# Altium PCB AICat V1.4 双面板 板厚1.6mm.PcbDoc (part 1 of 4)
Units mm, origin at the board's own origin, x right, y up, seen from the top; angles counter-clockwise.
Board outline 152.4 x 101.6 mm, 2 copper layers (Top Layer, Bottom Layer); 106 components, 84 nets, 315 pads, 240 vias.
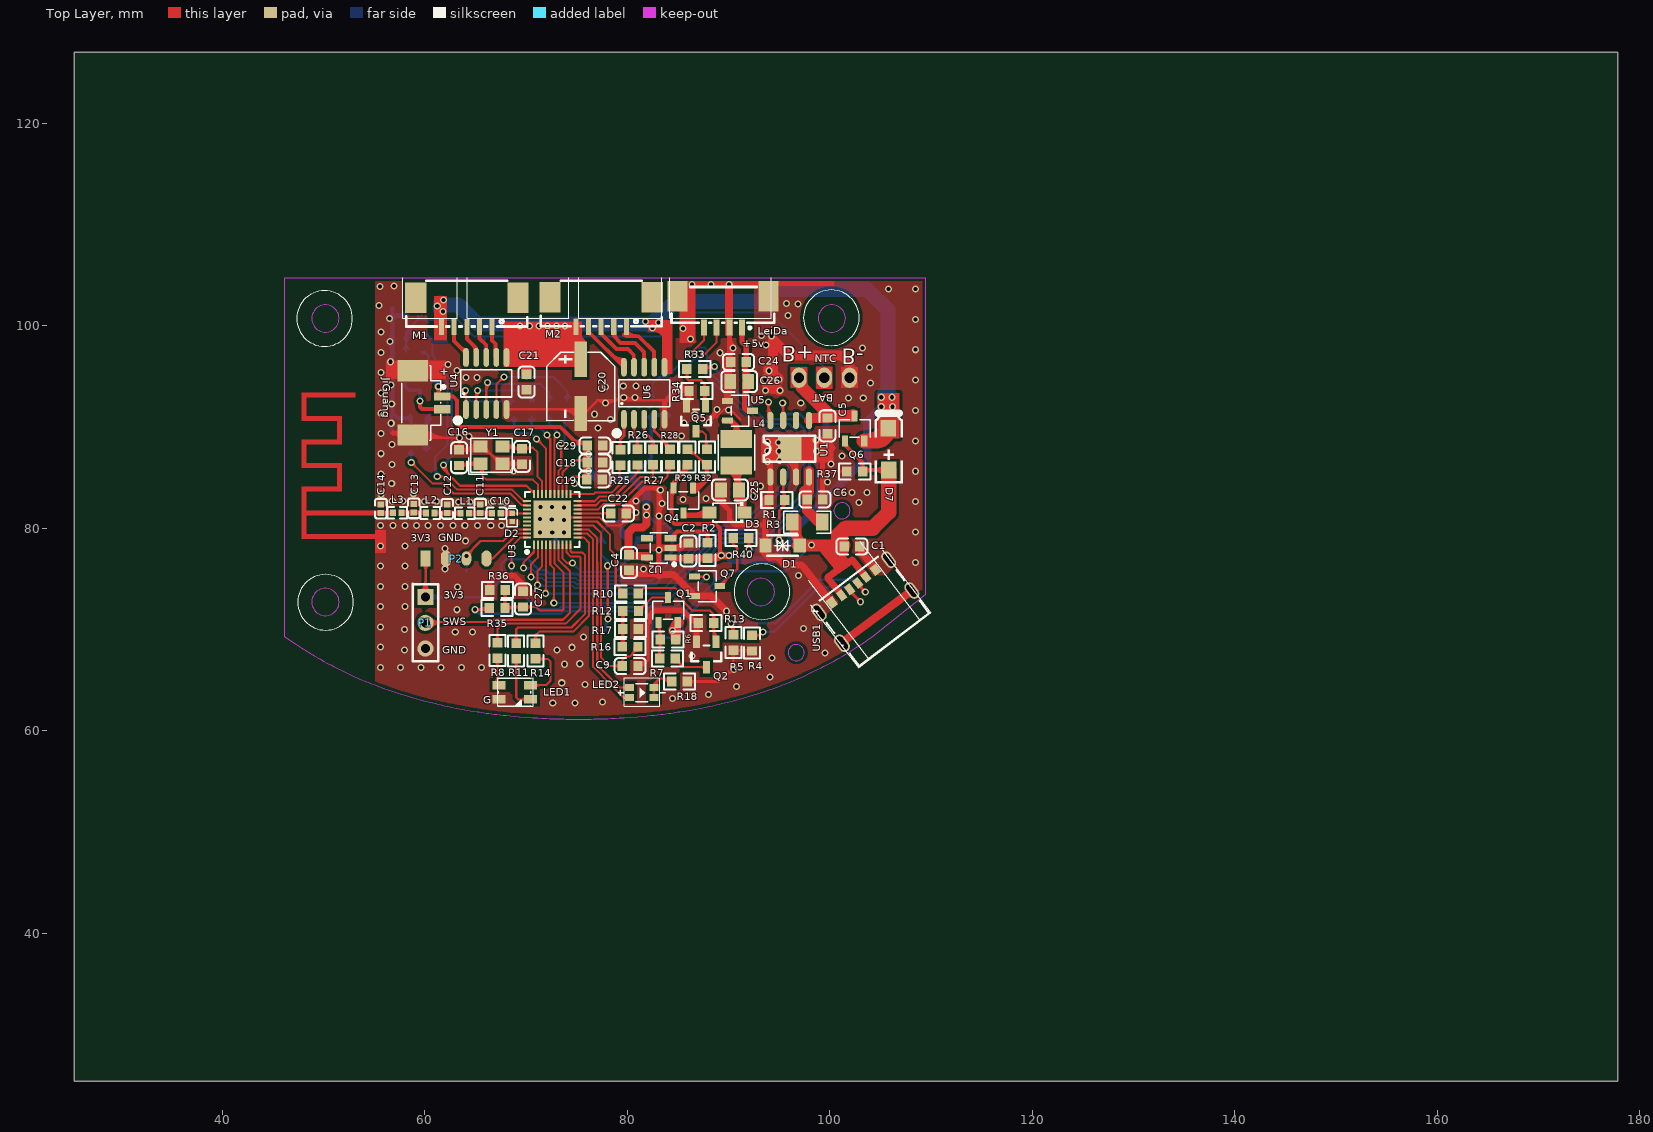
[diagram p0: Top Layer view]
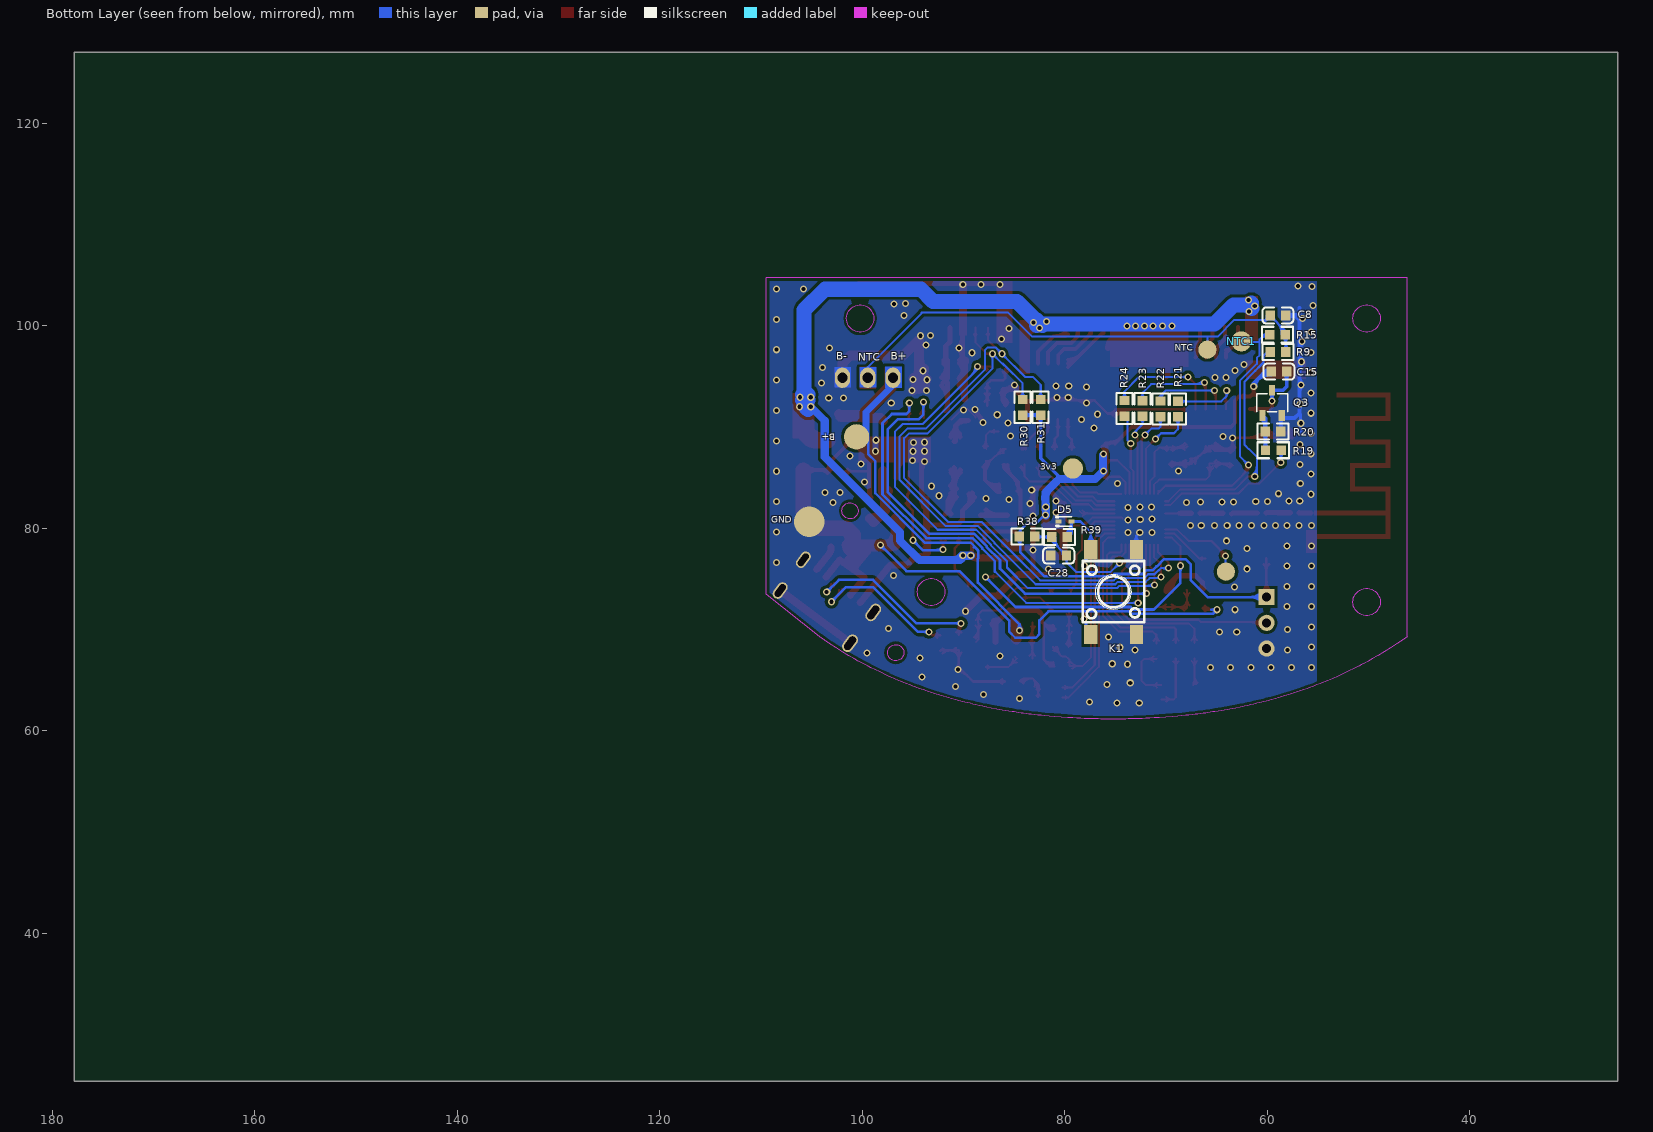
[diagram p1: Bottom Layer view, seen from below]
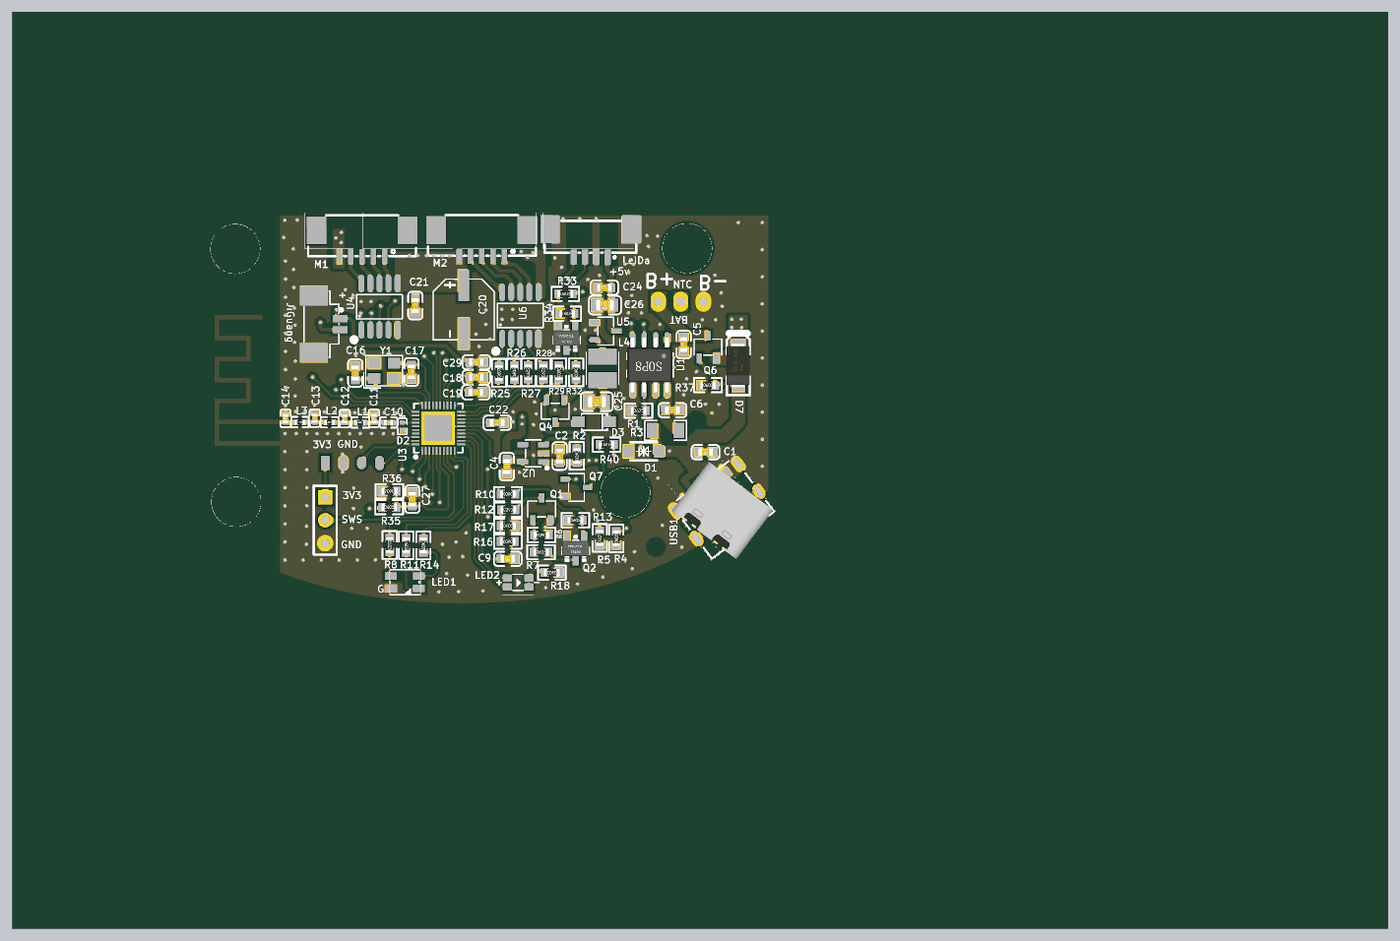
[diagram p5: 3D render of the assembled board from above, using the file's embedded part models]
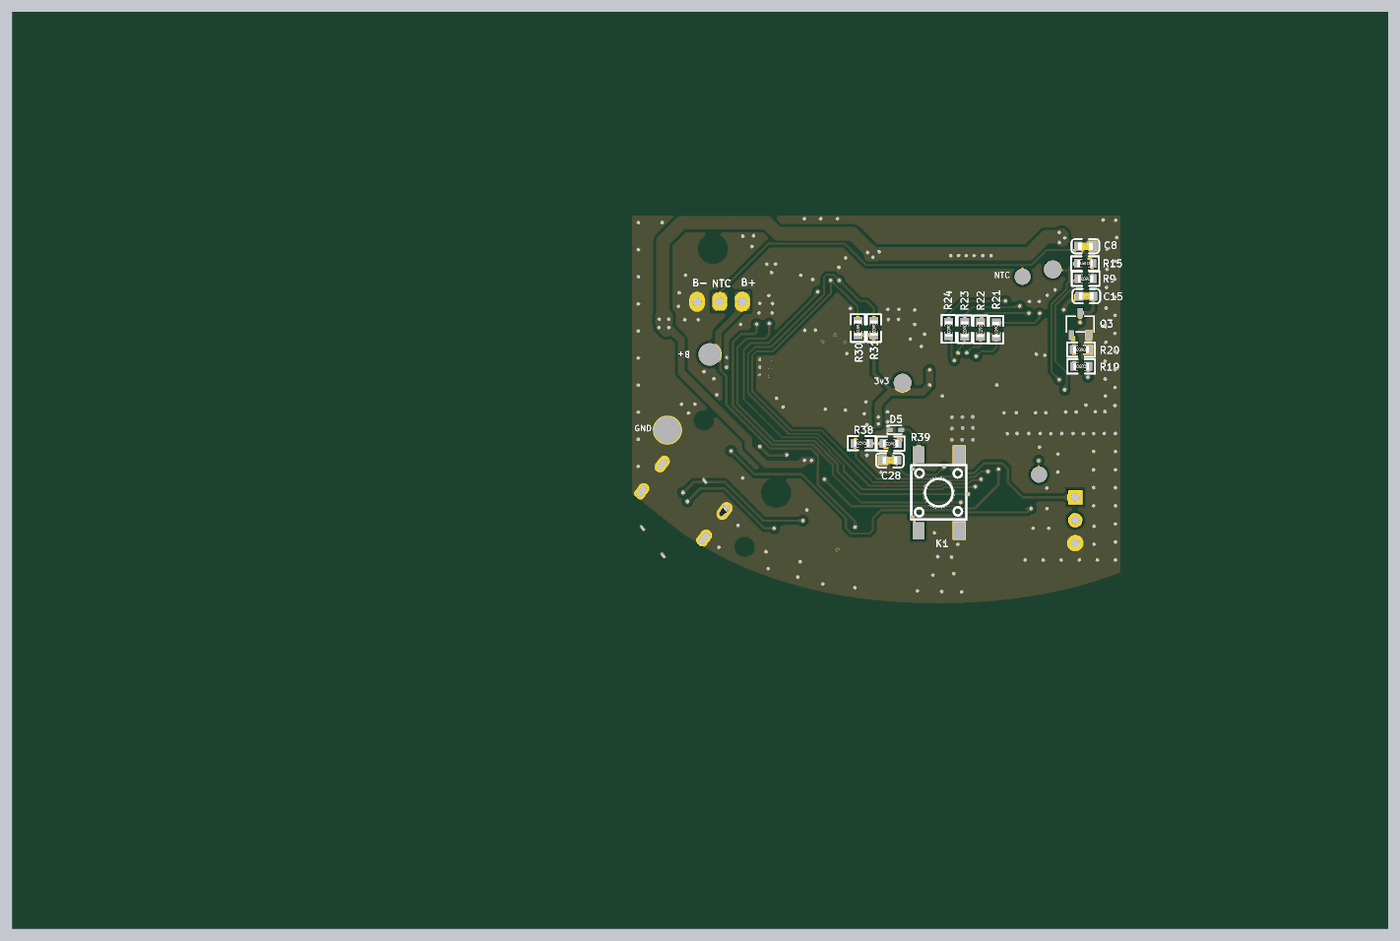
[diagram p6: 3D render of the assembled board from below, using the file's embedded part models]

## Layer stack, top to bottom
Top Layer: signal copper 0.0356
Dielectric: dielectric 0.32, FR-4, Dk 4.8
Bottom Layer: signal copper 0.0356

## Board outline
25.4,25.4 177.8,25.4 177.8,127 25.4,127

## Design rules (kind name [scope] priority, off if disabled: settings)
Clearance [All] p1: gap=0.178
ComponentClearance [All] p1: gap=0 collisioncheckmode=3 verticalgap=0 showdistances=FALSE
HoleToHoleClearance [All] p1: gap=0.102 allowstackedmicrovias=TRUE
MinimumSolderMaskSliver [All] p1: minsoldermaskwidth=0.051
PolygonConnect [All] p1: connectstyle=Direct reliefconductorwidth=0.254 reliefentries=4 polygonreliefangle="90 Angle"
RoutingVias [All] p1: holewidth=0.711 width=1.27 viastyle="Through Hole" minholewidth=0.711 minwidth=1.27 maxholewidth=0.711 maxwidth=1.27
SilkToSilkClearance [All] p1: silktosilkclearance=0
SilkscreenOverComponentPads [All] p1: minsilkscreentomaskgap=0
SolderMaskExpansion [All] p1: expansion=0.102
TestPointUsage [All] p1: valid=0 allowmultiple=FALSE
Testpoint [All] p1: side=15 testpointundercomponent=TRUE minsize=1.016 maxsize=2.54 preferedsize=1.524 minholesize=0 maxholesize=1.016 preferedholesize=0.813 testpointgrid=0.025 style=1023 order=0123456789
Width [All] p1: maxlimit=2.54 minlimit=0.203 preferedwidth=0.254 minimp=50.000000 maximp=50.000000 favimp=50.000000
19 further rules are at their usual default settings.

## Components (designator, comment, footprint, x,y, rotation, side; value= is the part's Value field where it differs from the comment)
3v3 "J-CSD" TP#1 79.197,85.903 r270 bottom (schematic designator TP3)
B+ "J-CSD" TP#2 100.559,89.027 r270 bottom (schematic designator TP3)
BAT "BX-PH2.0-3PWT" HDR-TH_3P-P2.50_ZX-XH2.54-3PWZ 100.152,99.009 r180 top (schematic designator BAT1)
C1 "0.1uF" 0603_C 102.184,78.207 r180 top
C2 "1uf" 0603_C 86.03,77.775 r270 top
C4 "10uF" 0603_C 80.188,76.606 r90 top
C5 "10uf" 0603_C 99.771,90.119 r270 top
C6 "10UF" 0603_c 98.527,82.855 r180 top
C8 "100nF" 0603_C 58.953,101.016 r180 bottom
C9 "100nF" 0603_C 80.289,66.396 r180 top
C10 "220pF" 0402_c 67.081,81.483 r180 top
C11 "NC" 0402_C 65.481,81.94 r270 top
C12 "NC" 0402_C 62.23,81.915 r270 top
C13 "NC" 0402_C 58.928,81.966 r270 top
C14 "NC" 0402_C 55.677,81.94 r270 top
C15 "0.1uf/25v" 0603_C 58.852,95.479 r0 bottom
C16 "12PF" 0603_c 63.398,86.97 r270 top
C17 "12PF" 0603_c 69.621,87.097 r90 top
C18 "1UF" 0603_c 76.81,86.487 r0 top
C19 "1UF" 0603_c 76.759,84.836 r0 top
C20 "220uF/10V" "SMD 6.3*5.4 电解" 75.387,93.853 r270 top
C21 "100nf" 0603_C 70.053,94.437 r90 top
C22 "1UF" 0603_c 79.121,81.458 r180 top
C24 "0.1uF" 0603_C 90.983,96.418 r0 top
C25 "22uf-16v" 0805_c 90.145,83.795 r180 top
C26 "22uf-16v" 0805_c 91.059,94.488 r180 top
C27 "0.1uF" 0603_C 69.723,73 r270 top
C28 "100nF" 0603_c 80.594,77.292 r180 bottom
C29 "22uF 10v" 0603_C 76.81,88.163 r180 top
D1 "SMF5.0CA_C726939" "SOD-123 双向" 95.504,78.232 r0 top
D2 "SE6V3LHN102T 6.3v单向" 0402-D 68.758,81.001 r270 top
D3 "DSK24" SOD-123FL 89.687,81.382 r180 top
D5 "" SOD-523_L1.2-W0.8-LS1.6-RD 79.985,80.67 r180 bottom
D7 "SS54" SMA 105.893,87.198 r270 top
GND "J-CSD" TP#3 105.232,80.645 r270 bottom (schematic designator TP3)
JiGuang "JiGuang" CONN-SMD_2P-P1.25-LT 60.274,92.38 r270 top (schematic designator CN1)
K1 "KEY" KEY_SMD_4P 75.184,73.762 r270 bottom locked
L1 "0R" 0402_R 63.957,81.483 r180 top
L2 "0R" 0402_R 60.554,81.509 r180 top
L3 "0R" 0402_R 57.277,81.534 r180 top
L4 "47uH" IND-SMD_L3.5-W3.0_CD31 90.78,87.503 r90 top
LED1 "XL-A3528RGBC-BM" LED-ARRAY-SMD_4P-L3.2-W2.8-LS3.5-BL_XL-A3528RGBC-BM 68.885,63.805 r0 top
LED2 "*" LED-SMD_4P-L3.2-W1.6-TL_XL-3216SURUGC 81.432,63.779 r0 top
LeiDa "HC-1.25-4PLT" CONN-SMD_4P-P1.25_LT 89.459,101.371 r180 top (schematic designator CN2)
M1 "MOTORA" CONN-SMD_1.25-5PLT 64.16,101.321 r180 top (schematic designator J1)
M2 "MOTORB" CONN-SMD_1.25-5PLT 77.419,101.346 r180 top (schematic designator J2)
NTC "J-CSD" TP#4 65.913,97.638 r270 bottom (schematic designator TP3)
NTC1 "J-CSD" TP#1 62.56,98.45 r270 bottom (schematic designator TP3)
P1 "DEBUG" SIP4-2.54#1 60.071,75.743 r270 top (schematic designator P2)
P2 "UART" SIP4-2.54#2 60.096,77.013 r0 top
Q1 "SI2301 P" SOT-23 84.252,71.399 r270 top
Q2 "S8050" SOT-23(SOT-23-3) 87.808,67.539 r90 top
Q3 "AO3400" SOT-23 59.309,91.872 r270 bottom
Q4 "SI2301 P" SOT-23 85.319,83.261 r90 top
Q5 "S8050" SOT-23(SOT-23-3) 86.792,90.83 r90 top
Q6 "3401" SOT-23 102.667,89.332 r270 top
Q7 "2N7002" SOT-23 87.376,74.066 r180 top
R1 "3.9K" 0603_R 94.767,82.804 r0 top
R2 "10k" 0603_R 87.935,77.8 r90 top
R3 "R250" 1206_R 97.612,80.569 r180 top
R4 "5.1K" 0603_R 92.304,68.656 r270 top
R5 "5.1K" 0603_R 90.475,68.707 r270 top
R6 "560K" 0603_R 84.023,69.037 r180 top
R7 "1K" 0603_R 83.972,67.132 r0 top
R8 "1k" 0603_R 67.208,67.92 r90 top
R9 "10k" 0603_R 58.928,97.409 r0 bottom
R10 "1K" 0603_r 80.315,73.558 r180 top
R11 "1k" 0603_R 69.037,67.894 r90 top
R12 "560K" 0603_R 80.34,71.831 r180 top
R13 "10K" 0603_r 87.782,70.663 r0 top
R14 "1k" 0603_R 70.942,67.869 r90 top
R15 "100R" 0603_R 58.979,99.111 r180 bottom
R16 "1K" 0603_R 80.289,68.301 r180 top
R17 "100K" 0603_R 80.315,70.053 r0 top
R18 "1K" 0603_R 85.166,64.872 r180 top
R19 "330R" 0603_R 59.411,87.706 r180 bottom
R20 "10K" 0603_R 59.436,89.56 r0 bottom
R21 "330R" 0603_R 68.834,91.77 r270 bottom
R22 "330R" 0603_R 70.561,91.796 r270 bottom
R23 "330R" 0603_R 72.314,91.821 r270 bottom
R24 "330R" 0603_R 74.092,91.846 r270 bottom
R25 "330R" 0603_R 79.324,86.995 r270 top
R26 "330R" 0603_R 81.026,87.02 r270 top
R27 "330R" 0603_R 82.55,87.046 r270 top
R28 "330R" 0603_R 84.226,87.046 r270 top
R29 "560K" 0603_R 85.954,87.046 r90 top
R30 "1M" 0603_R 84.15,91.948 r270 bottom
R31 "1M" 0603_R 82.372,91.948 r270 bottom
R32 "1K" 0603_R 87.859,87.046 r90 top
R33 "1K" 0603_r 86.665,95.733 r0 top
R34 "10K" 0603_r 86.868,93.548 r0 top
R35 "10K" 0603_R 67.158,72.111 r0 top
R36 "20K" 0603_R 67.183,73.889 r180 top
R37 "10K" 0603_R 102.464,85.623 r0 top
R38 "10k" 0603_R 83.718,79.197 r0 bottom
R39 "100R" 0603_r 80.518,79.146 r0 bottom
R40 "2k" 0603_R 91.237,79.045 r0 top
TP3 "J-CSD" TP#4 64.084,75.717 r270 bottom
U1 "TP4056X" SOP8-9 96.037,87.859 r0 top
U2 "SSP7615" SOT-23-5 82.931,77.622 r180 top
U3 "TLSR8208C" QFN-40_L5.0-W5.0-P0.40-BL-EP3.7 72.644,80.797 r0 top
U4 "ULN2802" ESSOP-10 66.218,94.107 r0 top
U5 "HE9116A50NR" SOT-23 90.627,91.389 r180 top
U6 "ULN2802" ESSOP-10 81.813,93.142 r0 top
USB1 "TYPE-C 6P" TPYE-C-6 103.505,72.771 r127 top
Y1 "24MHz +-20PPM" CRYSTAL-SMD_4P-L3.2-W2.5 66.878,87.173 r0 top

## Footprints (in the part's own frame and the unit in brackets; to place one, negate y for a bottom-side part, rotate by r counter-clockwise, add the part's x,y. Pads: shape width x height; smd on the part's side, far side on the other; paste and mask are expansions set on the pad)
0402-D [mm]
  rect 0.505x0.551 smd paste-100 mask+0.051: 1(-0.484,-0.131) 2(0.349,-0.131)
  silkscreen extent -1.27,-0.64 0.83,0.37
0402_c [mm]
  rect 0.6x0.65 smd: 1(-0.425,0) 2(0.425,0)
  silkscreen extent -0.98,-0.58 0.98,0.58, body extent -0.48,-0.3 0.52,0.3, height 0.2
0402_C [mm]
  rect 0.6x0.65 smd: 1(-0.425,0) 2(0.425,0)
  silkscreen extent -0.98,-0.58 0.98,0.58, body extent -0.48,-0.3 0.52,0.3, height 0.2
0402_R [mm]
  rect 0.6x0.65 smd: 1(-0.425,0) 2(0.425,0)
  silkscreen extent -0.97,-0.58 0.97,0.58, body extent -0.57,-0.27 0.58,0.28, height 0.41
0603_C [mm]
  rect 0.93x0.98 smd: 1(-0.77,0) 2(0.77,0)
  silkscreen extent -1.54,-0.79 1.54,0.79, body extent -0.8,-0.4 0.8,0.4, height 0.3
0603_c [mm]
  rect 0.93x0.98 smd: 1(-0.77,0) 2(0.77,0)
  silkscreen extent -1.54,-0.79 1.54,0.79, body extent -0.8,-0.4 0.8,0.4, height 0.3
0603_R [mm]
  rect 0.93x0.98 smd: 1(-0.77,0) 2(0.77,0)
  silkscreen extent -1.53,-0.79 1.54,0.79, body extent -0.85,-0.4 0.85,0.4, height 0.56
0603_r [mm]
  rect 0.93x0.98 smd: 1(-0.77,0) 2(0.77,0)
  silkscreen extent -1.53,-0.79 1.54,0.79, body extent -0.85,-0.4 0.85,0.4, height 0.56
0805_c [mm]
  rect 1.16x1.47 smd: 1(-0.89,0) 2(0.89,0)
  silkscreen extent -1.77,-1.04 1.77,1.04, body extent -1,-0.62 1,0.63, height 0.77
1206_R [mm]
  rect 1.208x1.701 smd: 1(-1.631,-0.039) 2(1.326,-0.039)
  silkscreen extent -2.46,-1.12 2.16,1.04
CONN-SMD_1.25-5PLT [mm]
  rect 0.5x1.6 smd paste+0.051: 1(-2.5,1.45) 2(-1.25,1.45) 3(0,1.45) 4(1.25,1.45) 5(2.5,1.45)
  rect 2.1x3 smd paste+0.051: 6(-5.05,-1.45) 7(5.05,-1.45)
  silkscreen extent -5.97,-3.12 5.97,1.4
CONN-SMD_2P-P1.25-LT [mm]
  rect 0.8x1.6 smd paste+0 mask+0.05: 1(-0.625,1.45) 2(0.625,1.45)
  rect 2.1x3 smd paste+0 mask+0.05: 3(-3.175,-1.45) 4(3.175,-1.45)
  silkscreen extent -3.68,-2.55 3.68,1.73
CONN-SMD_4P-P1.25_LT [mm]
  rect 0.6x1.6 smd paste+0.051: 1(-1.875,1.55) 2(-0.625,1.55) 3(0.625,1.55) 4(1.875,1.55)
  rect 2x3 smd paste+0.051: 5(-4.5,-1.55) 6(4.5,-1.55)
  silkscreen extent -5.06,-2.45 5.09,1.7
CRYSTAL-SMD_4P-L3.2-W2.5 [mm]
  rect 1.4x1.2 smd: 1(-1.383,-0.797) 2(0.817,-0.797) 3(0.817,0.903) 4(-1.383,0.903)
  silkscreen extent -2.54,-1.85 1.75,1.73
ESSOP-10 [mm]
  oval 0.56x1.855 smd paste+0.051: 1(-2.141,-2.375) 2(-1.141,-2.375) 3(-0.141,-2.375) 4(0.859,-2.375) 5(1.859,-2.375) 6(1.859,2.765) 7(0.859,2.765) 8(-0.141,2.765) 9(-1.141,2.765) 10(-2.141,2.765)
  silkscreen extent -2.67,-1.14 2.39,1.53
HDR-TH_3P-P2.50_ZX-XH2.54-3PWZ [mm]
  oval 1.5x2 hole 1: 1(-1.801,4.145) 2(0.699,4.145) 3(3.199,4.145)
IND-SMD_L3.5-W3.0_CD31 [mm]
  rect 1.8x3.12 smd: 1(-1.303,0) 2(1.303,0)
  silkscreen extent -1.75,-1.8 1.75,1.8
KEY_SMD_4P [mm]
  rect 1.9x1.3 smd: 1(-4.155,2.252) 2(4.244,2.252) 3(-4.155,-2.247) 4(4.244,-2.247)
  silkscreen extent -3.01,-3.05 3.02,3.05
LED-ARRAY-SMD_4P-L3.2-W2.8-LS3.5-BL_XL-A3528RGBC-BM [mm]
  rect 1.3x0.82 smd paste+0 mask+0.05: 1(-1.55,-0.7) 2(-1.55,0.7) 3(1.55,-0.7) 4(1.55,0.7)
  silkscreen extent -1.6,-1.4 1.6,1.4
LED-SMD_4P-L3.2-W1.6-TL_XL-3216SURUGC [mm]
  rect 0.9x0.7 smd paste+0.051: 1(-1.2,0.5) 2(1.2,0.5) 3(-1.2,-0.5) 4(1.2,-0.5)
  silkscreen extent -2.33,-0.89 2.3,0.89
QFN-40_L5.0-W5.0-P0.40-BL-EP3.7 [mm]
  rect 0.2x0.8 smd paste-100 mask+0.05: 1(-1.847,-2.425) 2(-1.447,-2.425) 3(-1.047,-2.425) 4(-0.647,-2.425) 5(-0.247,-2.425) 6(0.153,-2.425) 7(0.553,-2.425) 8(0.953,-2.425) 9(1.353,-2.425) 10(1.753,-2.425) 21(1.753,2.573) 22(1.353,2.573) 23(0.953,2.573) 24(0.553,2.573) 25(0.153,2.573) 26(-0.247,2.573) 27(-0.647,2.573) 28(-1.047,2.573) 29(-1.447,2.573) 30(-1.847,2.573)
  rect 0.8x0.2 smd paste-100 mask+0.05: 11(2.452,-1.726) 12(2.452,-1.326) 13(2.452,-0.926) 14(2.452,-0.526) 15(2.452,-0.126) 16(2.452,0.274) 17(2.452,0.674) 18(2.452,1.074) 19(2.452,1.474) 20(2.452,1.874) 31(-2.546,1.874) 32(-2.546,1.474) 33(-2.546,1.074) 34(-2.546,0.674) 35(-2.546,0.274) 36(-2.546,-0.126) 37(-2.546,-0.526) 38(-2.546,-0.926) 39(-2.546,-1.326) 40(-2.546,-1.726)
  rect 3.7x3.7 smd paste-100 mask+0.05: 41(-0.047,0.074)
  silkscreen extent -2.75,-3.28 2.65,2.77
SIP4-2.54#1 [mm]
  rect 1.6x1.6 hole 0.9: 2(2.54,0)
  round 1.6 hole 0.9: 3(5.08,0) 4(7.62,0)
  silkscreen extent 1.24,-1.27 8.89,1.27
SIP4-2.54#2 [mm]
  rect 1x1.6 smd: 1(0,0)
  oval 1x1.6 smd: 2(2,0) 4(6,0)
  oval 1x1.4 smd: 3(4,0)
SMA [mm]
  rect 1.65x1.53 smd: 1(1.449,-0.076) 2(-2.665,-0.102)
  silkscreen extent -4.16,-1.47 2.8,1.32, body extent -3.06,-1.39 1.84,1.18, height 2.39
"SMD 6.3*5.4 电解" [mm]
  rect 3.5x1.2 smd: 1(-2.822,0.023) 2(2.518,0.023)
  silkscreen extent -3.53,-3.35 3.22,3.4
"SOD-123 双向" [mm]
  rect 1.2x1.4 smd: 1(-1.864,0.06) 2(1.536,0.06)
  silkscreen extent -1.66,-0.94 1.34,1.06
SOD-123FL [mm]
  rect 1.4x1.2 smd: 1(1.579,-0.166) 2(-1.891,-0.166)
  silkscreen extent -1.76,-1.17 1.22,0.84
SOD-523_L1.2-W0.8-LS1.6-RD [mm]
  rect 0.6x0.36 smd paste+0.051 mask+0: 1(-0.65,0) 2(0.65,0)
  silkscreen extent -0.91,-0.55 0.68,0.55
SOP8-9 [mil]
  oval 24x66.93 smd: 1(-75,-110) 2(-25,-110) 3(25,-110) 4(75,-110) 5(75,110) 6(25,110) 7(-25,110) 8(-75,110)
  rect 90.55x90.55 smd: 9(0,0)
  silkscreen extent -100,-50 100,50, body extent -100,-119 98,119, height 63
SOT-23 [mm]
  rect 1.07x0.6 smd: 1(0.719,-1.166) 2(0.719,0.734) 3(-1.751,-0.216)
  silkscreen extent -1.39,-1.75 0.36,1.32
SOT-23(SOT-23-3) [mm]
  rect 1.25x0.7 smd: 1(1.25,-0.95) 2(1.25,0.95) 3(-1.25,0)
  silkscreen extent -0.65,-1.46 0.9,1.46, body extent -1.5,-1.5 1.5,1.5, height 1.3
SOT-23-5 [mm]
  rect 1.2x0.6 smd paste+0 mask+0.05: 1(-1.325,0.51) 2(-1.325,-0.44) 3(-1.325,-1.39) 4(0.975,-1.39) 5(0.975,0.51)
  silkscreen extent -1.85,-1.94 0.67,1.32
TP#1 [mm]
  round 2 smd: 1(0,0)
TP#2 [mm]
  round 2.5 smd: 1(0,0)
TP#3 [mm]
  round 3 smd: 1(0,0)
TP#4 [mm]
  round 1.8 smd: 1(0,0)
TPYE-C-6 [mm]
  oval 1.9x1.1 hole 0.7 slot 1.5 at 0 deg: 7(-1.9,4.32) 7(1.9,4.32)
  oval 1.8x1 hole 0.6 slot 1.4 at 0 deg: 7(-1.9,-4.32) 7(1.9,-4.32)
  rect 1x0.7 smd: A5(1.9,0.5) A9(1.9,-1.5) B5(1.9,-0.5) B9(1.9,1.5)
  rect 1x0.8 smd: A12(1.9,-2.7) B12(1.9,2.7)
  silkscreen extent -4.7,-4.32 2.79,4.65, body extent -4.55,-4.45 2.25,4.49, height 3.41

## Part data
C1 C4 C5 C15 C24 C27 C29: library part Cap, "Capacitor"
C2 C21 C25 C26: library part Cap1, "无极电容"
C6 C8 C9 C18 C19 C22: library part CAP
C10 C11 C12 C13 C14 C16 C17: library part CAP, "Capacitor"
C20: library part RVT1A221M0605_C72494
C28: library part CAP_0603
D2: library part TPNSR05F20NXT5G
D3 D7: library part "Diode 1N4148", "High Conductance Fast Diode"
D5: library part LESD5Z5.0CT1G
JiGuang: library part HC-1.25-2PLT
K1: library part TS-1002S-05026C
L1 L2 L3: library part INDUCTOR
L4: library part "CD31-470M 47UH"
LED2: library part TJ-S2012SW8TCGLC2R2G-A5
M1 M2: library part HC-1.25-5PLT
P1 P2: library part "Header 4", "Header, 4-Pin"
Q1 Q3 Q4: library part JMTL3400A
Q2 Q5: library part NPN_sot23, "NPN三极管"
Q6: library part CJ3401
Q7: library part AO3400_SOT23
R1 R3 R4 R5 R6 R7 R8 R11 R12 R14 R16 R17 R18 R20 R29 R30 R31 R32 R35 R36 R38 R40: library part RES
R2 R9 R10 R13 R15 R19 R21 R22 R23 R24 R25 R26 R27 R28 R33 R34 R37: library part Res2, "Resistor"
R39: library part Res_0603
U1: library part TP4056, "TP4056"
U2: library part SSP7615-33M5R
U4 U6: library part ULN2802_C2828555
USB1: library part "TYPE-C 6P LTH6.5"
Y1: library part TAXM13.56M4RLBCCT2T

## Via types
v1: diameter 0.7, hole 0.4, Top Layer to Bottom Layer, tented both sides, 240 vias

## Nets (pads, with @x,y where several pads share a name; then routed paths per layer and width w, separated by ;. In a path a pad name is that pad's centre, name@x,y a point inside that pad or via, vN(x,y) a via of type N, cw(c..) or ccw(c..) an arc to the next point about the centre after c; other vN are vias at no path point)
3V3: 3v3.1 C4.2 C15.2 C18.1 C19.1 C29.2 JiGuang.1 P1.2 P2.1 R30.2 R31.2 R38.2 U2.5 U3.22 U3.23 | length 172.2
  Top Layer w0.203: U3.23@73.597,83.371 73.597,85.51 74.803,86.716 75.565,86.716 ; U3.22@73.997,83.371 73.997,84.379 73.997,84.563 74.524,85.09 75.405,85.09 ; 75.393,85.09 cw(c75.393,84.6) C19.1@75.842,84.797 ; C18.1@75.605,86.716 cw(c75.605,86.434) C18.1@75.882,86.484 ; C18.1@75.682,86.448 ccw(c75.362,86.39) 75.362,86.716 75.565,86.716 ; C18.1@75.963,86.716 75.565,86.716
  Top Layer w0.254: P1.2@60.071,73.203 60.096,73.228 P2.1@60.096,77.013 ; P1.2@59.595,73.679 ccw(c58.385,74.889) 60.096,74.889 ; P1.2@59.595,73.679 ccw(c58.385,74.889) 60.096,74.889 ; P1.2@59.595,73.679 ccw(c58.385,74.889) 60.096,74.889 ; P1.2@59.775,73.499 ccw(c58.998,74.276) 60.096,74.276 ; P1.2@59.775,73.499 ccw(c58.998,74.276) 60.096,74.276 ; P1.2@59.775,73.499 ccw(c58.998,74.276) 60.096,74.276 ; P2.1@59.833,76.449 cw(c59.196,75.812) 60.096,75.812 ; P2.1@59.833,76.449 cw(c59.196,75.812) 60.096,75.812 ; P2.1@59.833,76.449 cw(c59.196,75.812) 60.096,75.812 ; 60.096,74.153 ccw(c61.021,74.153) P1.2@60.367,73.499 ; 60.096,74.153 ccw(c61.021,74.153) P1.2@60.367,73.499 ; 60.096,74.153 ccw(c61.021,74.153) P1.2@60.367,73.499 ; 60.096,74.766 ccw(c61.634,74.766) P1.2@60.547,73.679 ; 60.096,74.766 ccw(c61.634,74.766) P1.2@60.547,73.679 ; 60.096,74.766 ccw(c61.634,74.766) P1.2@60.547,73.679 ; 60.096,75.812 cw(c60.997,75.812) P2.1@60.36,76.449 ; 60.096,75.812 cw(c60.997,75.812) P2.1@60.36,76.449 ; 60.096,75.812 cw(c60.997,75.812) P2.1@60.36,76.449
  Top Layer w0.381: v1(61.341,93.98) 61.341,93.388 JiGuang.1@61.724,93.005 62.824,93.005 63.195,92.634 63.195,90.424 63.602,90.018 73.387,90.018 74.044,89.36 ; 74.447,88.957 74.044,89.36 ; 74.56,88.844 ccw(c75.481,89.765) 75.481,88.463 ; 75.038,88.367 74.044,89.36 ; C29.2@75.596,88.367 C29.2@75.989,88.367 ; C19.1@75.963,85.09 C19.1@75.989,85.115 ; JiGuang.1@61.176,93.153 ccw(c60.778,93.551) 61.341,93.551 ; JiGuang.1@61.176,93.153 ccw(c60.778,93.551) 61.341,93.551 ; JiGuang.1@61.176,93.153 ccw(c60.778,93.551) 61.341,93.551 ; v1@61.228,93.867 cw(c60.956,93.595) 61.341,93.595 ; v1@61.228,93.867 cw(c60.956,93.595) 61.341,93.595 ; v1@61.228,93.867 cw(c60.956,93.595) 61.341,93.595 ; 61.341,93.47 ccw(c61.789,93.47) JiGuang.1@61.472,93.153 ; 61.341,93.47 ccw(c61.789,93.47) JiGuang.1@61.472,93.153 ; 61.341,93.47 ccw(c61.789,93.47) JiGuang.1@61.472,93.153 ; 61.341,93.595 cw(c61.726,93.595) v1@61.454,93.867 ; 61.341,93.595 cw(c61.726,93.595) v1@61.454,93.867 ; 61.341,93.595 cw(c61.726,93.595) v1@61.454,93.867 ; JiGuang.1@62.272,92.857 cw(c62.63,92.499) 62.63,93.005 ; JiGuang.1@62.272,92.857 cw(c62.63,92.499) 62.63,93.005 ; JiGuang.1@62.272,92.857 cw(c62.63,92.499) 62.63,93.005 ; JiGuang.1@62.272,93.153 ccw(c62.63,93.511) 62.63,93.005 ; JiGuang.1@62.272,93.153 ccw(c62.63,93.511) 62.63,93.005 ; JiGuang.1@62.272,93.153 ccw(c62.63,93.511) 62.63,93.005
  Top Layer w0.6: C19.1@75.989,85.115 75.989,86.487 C29.2@75.989,88.163 ; 75.989,85.941 cw(c76.56,85.941) C18.1@76.156,86.345 ; 75.989,87.033 ccw(c76.56,87.033) C18.1@76.156,86.629 ; 75.989,87.617 cw(c76.561,87.617) C29.2@76.156,88.022
  Top Layer w0.8: C4.2@80.137,77.217 80.137,78.435 ; C4.2@80.137,77.266 U2.5@81.93,77.266 ; C4.2@80.137,77.836 ccw(c80.832,77.836) C4.2@80.34,77.344 ; 80.137,77.978 80.137,78.435 ; 81.001,80.061 80.62,80.061 ; v1@81.882,82.093 v1(81.882,81.323) 81.89,81.315 81.89,80.416 81.534,80.061 80.62,80.061 ; U2.5@81.93,77.139 U2.5@81.956,77.113 ; 80.137,78.435 80.137,79.578 80.62,80.061
  Bottom Layer w0.254: P1.2@60.071,73.203 65.888,73.203 67.539,74.854 67.539,76.403 68.097,76.962 70.18,76.962 70.906,76.236 70.939,76.236 71.305,75.87 71.933,75.87 72.314,75.489 75.092,75.489 75.32,75.26 82.017,75.26 84.387,77.63 84.387,79.824 ; v1@81.732,81.935 cw(c81.351,81.554) 81.89,81.554 cw(c82.428,81.554) v1@82.047,81.935 ; v1@81.89,81.432 82.855,80.467 83.744,80.467 84.387,79.824 ; R38.2@84.249,78.933 cw(c83.918,78.601) 84.387,78.601 ; R38.2@84.249,79.461 ccw(c83.918,79.793) 84.387,79.793 ; 84.387,78.111 cw(c85.55,78.111) R38.2@84.727,78.933 ; R38.2@84.591,79.544 cw(c84.681,79.824) 84.387,79.824 ; P1.2@60.367,72.907 cw(c61.083,72.191) 61.083,73.203 ; P1.2@60.367,72.907 cw(c61.083,72.191) 61.083,73.203 ; P1.2@60.367,72.907 cw(c61.083,72.191) 61.083,73.203 ; P1.2@60.367,73.499 ccw(c61.083,74.214) 61.083,73.203 ; P1.2@60.367,73.499 ccw(c61.083,74.214) 61.083,73.203 ; P1.2@60.367,73.499 ccw(c61.083,74.214) 61.083,73.203 ; P1.2@60.547,72.727 cw(c61.696,71.578) 61.696,73.203 ; P1.2@60.547,72.727 cw(c61.696,71.578) 61.696,73.203 ; P1.2@60.547,72.727 cw(c61.696,71.578) 61.696,73.203 ; P1.2@60.547,73.679 ccw(c61.696,74.828) 61.696,73.203 ; P1.2@60.547,73.679 ccw(c61.696,74.828) 61.696,73.203 ; P1.2@60.547,73.679 ccw(c61.696,74.828) 61.696,73.203
  Bottom Layer w0.381: C15.2@59.622,95.479 60.198,95.479 ; v1(61.341,93.98) 61.341,94.336 ; 80.772,84.658 80.577,84.853 80.442,84.988 82.372,86.919 R31.2@82.372,91.178 R30.2@84.15,91.178 ; C15.2@59.559,95.539 cw(c59.844,95.151) 60.185,95.492 ; C15.2@59.559,95.539 cw(c59.844,95.151) 60.185,95.492 ; C15.2@59.559,95.539 cw(c59.844,95.151) 60.185,95.492 ; C15.2@59.622,95.179 cw(c59.622,93.065) 61.117,94.56 ; C15.2@59.622,95.179 cw(c59.622,93.065) 61.117,94.56 ; C15.2@59.622,95.179 cw(c59.622,93.065) 61.117,94.56 ; C15.2@59.622,95.56 cw(c59.622,94.366) 60.466,95.21 ; C15.2@59.622,95.56 cw(c59.622,94.366) 60.466,95.21 ; C15.2@59.622,95.56 cw(c59.622,94.366) 60.466,95.21 ; C15.2@59.784,95.232 cw(c60.11,94.789) 60.499,95.178 ; C15.2@59.784,95.232 cw(c60.11,94.789) 60.499,95.178 ; C15.2@59.784,95.232 cw(c60.11,94.789) 60.499,95.178 ; C15.2@59.835,95.306 cw(c60.198,95.011) 60.198,95.479 ; C15.2@59.835,95.306 cw(c60.198,95.011) 60.198,95.479 ; C15.2@59.835,95.306 cw(c60.198,95.011) 60.198,95.479 ; C15.2@59.835,95.652 ccw(c60.198,95.946) 60.198,95.479 ; C15.2@59.835,95.652 ccw(c60.198,95.946) 60.198,95.479 ; C15.2@59.835,95.652 ccw(c60.198,95.946) 60.198,95.479 ; 60.198,95.479 61.341,94.336 ; 60.817,94.859 cw(c59.938,93.98) v1@61.182,93.98 ; 60.817,94.859 cw(c59.938,93.98) v1@61.182,93.98 ; 60.817,94.859 cw(c59.938,93.98) v1@61.182,93.98 ; 61.341,94.336 ccw(c61.658,94.336) 61.447,94.099 cw(c61.658,94.336) 61.341,94.336 ; 61.341,94.336 cw(c61.024,94.336) 61.235,94.099 ccw(c61.024,94.336) 61.341,94.336 ; R31.2@82.178,90.984 cw(c81.709,90.515) 82.372,90.515 ; R31.2@82.178,90.984 cw(c81.709,90.515) 82.372,90.515 ; R31.2@82.178,90.984 cw(c81.709,90.515) 82.372,90.515 ; 82.372,90.515 cw(c83.035,90.515) R31.2@82.566,90.984 ; 82.372,90.515 cw(c83.035,90.515) R31.2@82.566,90.984 ; 82.372,90.515 cw(c83.035,90.515) R31.2@82.566,90.984 ; R31.2@82.591,90.984 cw(c83.06,90.515) 83.06,91.178 ; R31.2@82.591,90.984 cw(c83.06,90.515) 83.06,91.178 ; R31.2@82.591,90.984 cw(c83.06,90.515) 83.06,91.178 ; R31.2@82.591,91.372 ccw(c83.06,91.841) 83.06,91.178 ; R31.2@82.591,91.372 ccw(c83.06,91.841) 83.06,91.178 ; R31.2@82.591,91.372 ccw(c83.06,91.841) 83.06,91.178 ; 83.463,91.178 cw(c83.463,90.515) R30.2@83.931,90.984 ; 83.463,91.178 ccw(c83.463,91.841) R30.2@83.931,91.372 ; 83.463,91.178 ccw(c83.463,91.841) R30.2@83.931,91.372 ; 83.463,91.178 cw(c83.463,90.515) R30.2@83.931,90.984 ; 83.463,91.178 ccw(c83.463,91.841) R30.2@83.931,91.372 ; 83.463,91.178 cw(c83.463,90.515) R30.2@83.931,90.984
  Bottom Layer w0.8: v1(76.192,85.649) 76.988,84.853 80.577,84.853 ; v1@76.217,85.75 v1@76.217,87.224 ; 80.772,84.658 81.89,83.541 81.89,82.906 v1(81.877,82.102) 81.865,81.323 v1@81.864,81.28 ; 81.526,83.904 cw(c80.527,82.906) 81.94,82.906 ; 81.526,83.904 cw(c80.527,82.906) 81.94,82.906 ; 81.526,83.904 cw(c80.527,82.906) 81.94,82.906
  other v1: 76.192,87.325
+5V: C24.2 C26.1 LeiDa.1 U5.3 | length 24.6
  Top Layer w0.508: LeiDa.1@91.334,99.821 91.334,98.404 91.753,97.985 C24.2@91.753,96.418 ; 91.592,91.832 C26.1@91.592,94.412 ; C24.2@91.897,96.418 C24.2@91.753,96.418 ; C26.1@91.997,94.389 91.593,94.793 91.593,96.418 C24.2@91.753,96.418 ; 91.592,92.127 ccw(c92.283,92.127) 91.795,91.638 ; 91.592,92.127 ccw(c92.283,92.127) 91.795,91.638 ; 91.592,92.127 ccw(c92.283,92.127) 91.795,91.638 ; 91.592,92.685 cw(c93.597,92.685) C26.1@92.18,94.102 ; 91.592,92.685 cw(c93.597,92.685) C26.1@92.18,94.102 ; 91.592,92.685 cw(c93.597,92.685) C26.1@92.18,94.102 ; 91.593,95.499 cw(c92.647,95.499) C24.2@91.902,96.244 ; 91.593,95.499 cw(c92.647,95.499) C24.2@91.902,96.244 ; 91.593,95.499 cw(c92.647,95.499) C24.2@91.902,96.244 ; C24.2@91.593,96.289 ccw(c93.595,96.289) C26.1@92.18,94.874 ; C24.2@91.593,96.289 ccw(c93.595,96.289) C26.1@92.18,94.874 ; C24.2@91.593,96.289 ccw(c93.595,96.289) C26.1@92.18,94.874 ; C24.2@91.604,96.593 ccw(c91.243,96.953) 91.753,96.953 ; C24.2@91.604,96.593 ccw(c91.243,96.953) 91.753,96.953 ; C24.2@91.604,96.593 ccw(c91.243,96.953) 91.753,96.953 ; 91.753,96.953 ccw(c92.262,96.953) C24.2@91.902,96.593 ; 91.753,96.953 ccw(c92.262,96.953) C24.2@91.902,96.593 ; 91.753,96.953 ccw(c92.262,96.953) C24.2@91.902,96.593
AD_BAT: C9.2 R16.1 U3.14 | length 30
  Top Layer w0.203: U3.14@75.096,80.271 76.65,80.271 77.419,79.502 77.419,67.234 78.257,66.396 C9.2@79.519,66.396 79.519,66.997 ; 80.51,67.581 ccw(c79.816,68.276) R16.1@80.798,68.276 ; 80.614,67.686 cw(c81.161,67.139) R16.1@81.161,67.912 ; R16.1@81.161,68.301 81.161,68.232 80.289,67.361 79.883,67.361 79.519,66.997 ; 78.642,66.396 ccw(c78.642,67.273) 79.262,66.653 cw(c78.642,67.273) 78.642,66.396 ; 78.642,66.396 cw(c78.642,65.518) 79.262,66.139 ccw(c78.642,65.518) 78.642,66.396 ; C9.2@79.363,66.748 ccw(c79.244,66.997) 79.519,66.997 ; C9.2@79.363,66.748 ccw(c79.244,66.997) 79.519,66.997 ; C9.2@79.363,66.748 ccw(c79.244,66.997) 79.519,66.997 ; 79.519,66.997 ccw(c79.795,66.997) C9.2@79.676,66.748 ; 79.519,66.997 ccw(c79.795,66.997) C9.2@79.676,66.748 ; 79.519,66.997 ccw(c79.795,66.997) C9.2@79.676,66.748 ; 80.362,67.433 ccw(c79.554,68.241) 80.696,68.267 cw(c79.554,68.241) 80.362,67.433 ; 80.686,67.758 cw(c81.059,67.385) 81.059,67.912 ccw(c81.059,67.385) 80.686,67.758 ; 80.698,67.769 ccw(c80.211,68.256) 80.899,68.272 cw(c80.211,68.256) 80.698,67.769
AD_NTC: NTC1.1 R15.1 U3.30 | length 46.7
  Top Layer w0.203: v1(61.849,86.233) 61.849,85.838 ; 70.435,83.819 ccw(c70.797,84.18) U3.30@70.797,83.669 ; U3.30@70.782,83.472 ccw(c70.797,83.487) U3.30@70.797,83.466 ; U3.30@70.797,83.371 70.797,83.457 70.053,84.201 63.486,84.201 61.849,85.838 ; v1@61.691,86.233 ccw(c62.263,86.233) 61.858,85.829 ; v1@61.691,86.233 ccw(c62.263,86.233) 61.858,85.829 ; v1@61.691,86.233 ccw(c62.263,86.233) 61.858,85.829 ; v1@61.741,86.009 cw(c61.659,85.838) 61.849,85.838 ; v1@61.741,86.009 cw(c61.659,85.838) 61.849,85.838 ; v1@61.741,86.009 cw(c61.659,85.838) 61.849,85.838 ; v1@61.741,86.009 cw(c61.659,85.838) 61.849,85.838 ; 61.849,85.838 cw(c62.039,85.838) v1@61.957,86.009 ; 61.849,85.838 cw(c62.039,85.838) v1@61.957,86.009 ; 61.849,85.838 cw(c62.039,85.838) v1@61.957,86.009 ; 61.849,85.838 cw(c62.039,85.838) v1@61.957,86.009 ; v1@61.894,86.233 ccw(c62.957,86.233) 62.205,85.482 ; v1@61.894,86.233 ccw(c62.957,86.233) 62.205,85.482 ; v1@61.894,86.233 ccw(c62.957,86.233) 62.205,85.482 ; v1@62.097,86.233 ccw(c63.65,86.233) 62.552,85.135 ; v1@62.097,86.233 ccw(c63.65,86.233) 62.552,85.135 ; v1@62.097,86.233 ccw(c63.65,86.233) 62.552,85.135
  Bottom Layer w0.203: R15.1@59.749,99.111 60.3,99.111 60.757,98.654 60.757,98.374 ; v1(61.849,86.233) 62.713,87.097 62.713,94.57 61.036,96.246 61.036,96.825 60.757,97.104 60.757,98.374 ; NTC1.1@62.23,98.45 62.154,98.374 60.757,98.374 ; R15.1@59.698,99.327 cw(c59.821,98.737) 60.247,99.163 ; R15.1@59.698,99.327 cw(c59.821,98.737) 60.247,99.163 ; R15.1@59.698,99.327 cw(c59.821,98.737) 60.247,99.163 ; R15.1@59.74,99.128 cw(c59.913,98.298) 60.513,98.897 ; R15.1@59.74,99.128 cw(c59.913,98.298) 60.513,98.897 ; R15.1@59.74,99.128 cw(c59.913,98.298) 60.513,98.897 ; R15.1@59.782,98.929 cw(c60.005,97.858) 60.779,98.632 ; R15.1@59.782,98.929 cw(c60.005,97.858) 60.779,98.632 ; R15.1@59.782,98.929 cw(c60.005,97.858) 60.779,98.632 ; v1@61.849,86.481 ccw(c61.849,87.081) 62.273,86.657 ; v1@61.849,86.481 ccw(c61.849,87.081) 62.273,86.657 ; v1@61.849,86.481 ccw(c61.849,87.081) 62.273,86.657 ; v1@62.097,86.233 cw(c62.697,86.233) 62.273,86.657 ; v1@62.097,86.233 cw(c62.697,86.233) 62.273,86.657 ; v1@62.097,86.233 cw(c62.697,86.233) 62.273,86.657
BAT+: B+.1 BAT.3 C5.1 Q1.2 Q6.3 R6.1 U1.5 | length 66.8
  Top Layer w1: R6.1@84.793,69.037 84.793,70.387 Q1.2@85.087,70.68 ; Q1.2@84.793,70.219 cw(c85.314,70.219) Q1.2@84.946,70.587 ; BAT.3@96.953,94.864 97.155,94.662 BAT.3@97.155,94.005 ; U1.5@97.942,90.653 98.179,90.889 C5.1@99.771,90.889 C5.1@99.771,90.965 ; 98.966,90.965 C5.1@99.771,90.965 ; 99.771,91.389 C5.1@99.771,90.965 ; C5.1@99.916,90.965 C5.1@99.771,90.965 ; 102.083,91.084 Q6.3@102.276,91.278 ; v1@84.561,69.795 ccw(c84.001,70.355) Q1.2@84.793,70.355 ; v1@84.561,69.795 ccw(c84.001,70.355) Q1.2@84.793,70.355 ; v1@84.561,69.795 ccw(c84.001,70.355) Q1.2@84.793,70.355 ; v1@84.561,70.007 cw(c84.001,69.447) R6.1@84.793,69.447 ; v1@84.561,70.007 cw(c84.001,69.447) R6.1@84.793,69.447 ; v1@84.561,70.007 cw(c84.001,69.447) R6.1@84.793,69.447 ; BAT.3@96.807,94.661 cw(c96.318,93.982) BAT.3@97.155,93.982 ; BAT.3@96.807,94.661 cw(c96.318,93.982) BAT.3@97.155,93.982 ; BAT.3@96.807,94.661 cw(c96.318,93.982) BAT.3@97.155,93.982 ; 99.435,91.726 cw(c98.598,90.889) C5.1@99.781,90.889 ; 99.435,91.726 cw(c98.598,90.889) C5.1@99.781,90.889 ; 99.435,91.726 cw(c98.598,90.889) C5.1@99.781,90.889 ; BAT.3@97.203,94.864 ccw(c99.392,94.864) 97.844,93.316 cw(c99.392,94.864) BAT.3@97.203,94.864
  Top Layer w1.2: BAT.3@97.155,94.005 99.771,91.389 ; C5.1@99.597,91.084 102.083,91.084
  Bottom Layer w0.254: v1@84.297,70.058 ccw(c83.917,70.439) 84.455,70.439 ccw(c84.993,70.439) v1@84.613,70.058 ; v1(84.455,69.901) 84.455,70.51 88.57,74.625 88.57,77.007 88.551,77.026 88.551,77.781 88.57,77.8 ; 88.976,78.13 88.9,78.13 88.57,77.8 ; BAT.3@96.953,94.241 cw(c96.953,93.422) 97.532,94.001 ; BAT.3@96.953,94.864 97.028,94.789 BAT.3@97.028,94.505 ; BAT.3@97.068,94.864 ccw(c98.031,94.864) BAT.3@97.35,94.183 ; 99.382,91.702 99.382,87.298 98.711,86.627 98.711,83.463 93.836,78.588 89.281,78.588 88.57,77.876 88.57,77.8
  Bottom Layer w0.381: v1@84.342,70.014 ccw(c84.07,70.286) 84.455,70.286 ccw(c84.84,70.286) v1@84.568,70.014
  Bottom Layer w0.635: BAT.3@96.953,94.864 96.953,94.131 99.382,91.702 99.644,91.44 B+.1@99.644,88.925
CC1: R4.1 USB1.A5 | length 28.1
  Top Layer w0.254: R4.1@92.304,69.426 93.074,69.426 ; v1(93.421,69.774) 93.074,69.426 ; USB1.A5@101.962,73.987 101.962,73.806 v1(103.022,72.746) ; R4.1@92.583,69.204 cw(c93.074,68.774) 93.074,69.426 ; R4.1@92.583,69.204 cw(c93.074,68.774) 93.074,69.426 ; R4.1@92.583,69.204 cw(c93.074,68.774) 93.074,69.426 ; R4.1@92.583,69.649 ccw(c93.074,70.078) 93.074,69.426 ; R4.1@92.583,69.649 ccw(c93.074,70.078) 93.074,69.426 ; R4.1@92.583,69.649 ccw(c93.074,70.078) 93.074,69.426 ; USB1.A5@102.275,73.868 ccw(c103.181,73.868) 102.541,73.227 ; USB1.A5@102.275,73.868 ccw(c103.181,73.868) 102.541,73.227 ; USB1.A5@102.275,73.868 ccw(c103.181,73.868) 102.541,73.227 ; 102.642,73.126 cw(c102.261,72.746) v1@102.799,72.746 ; 102.642,73.126 ccw(c103.022,73.507) v1@103.022,72.969 ; 102.642,73.126 ccw(c103.022,73.507) v1@103.022,72.969 ; 102.642,73.126 cw(c102.261,72.746) v1@102.799,72.746 ; 102.642,73.126 ccw(c103.022,73.507) v1@103.022,72.969 ; 102.642,73.126 cw(c102.261,72.746) v1@102.799,72.746
  Bottom Layer w0.254: v1(93.421,69.774) 94.513,69.774 98.933,74.193 101.6,74.193 v1@103.035,72.758 ; v1@93.579,69.616 cw(c93.96,69.235) 93.96,69.774 ; v1@93.579,69.616 cw(c93.96,69.235) 93.96,69.774 ; v1@93.579,69.616 cw(c93.96,69.235) 93.96,69.774 ; v1@93.579,69.931 ccw(c93.96,70.312) 93.96,69.774 ; v1@93.579,69.931 ccw(c93.96,70.312) 93.96,69.774 ; v1@93.579,69.931 ccw(c93.96,70.312) 93.96,69.774 ; 102.624,73.17 cw(c102.2,72.746) v1@102.799,72.746 ; 102.624,73.17 cw(c102.2,72.746) v1@102.799,72.746 ; 102.624,73.17 cw(c102.2,72.746) v1@102.799,72.746 ; 102.685,73.108 ccw(c103.022,73.446) v1@103.022,72.969 ; 102.685,73.108 ccw(c103.022,73.446) v1@103.022,72.969 ; 102.685,73.108 ccw(c103.022,73.446) v1@103.022,72.969
CC2: R5.1 USB1.B5 | length 36.7
  Top Layer w0.254: v1(90.246,70.612) 90.475,70.383 R5.1@90.475,69.477 ; USB1.B5@102.761,74.589 102.761,74.455 v1(103.505,73.711) ; v1@90.089,70.454 cw(c89.156,69.522) R5.1@90.475,69.522 ; v1@90.089,70.454 cw(c89.156,69.522) R5.1@90.475,69.522 ; v1@90.089,70.454 cw(c89.156,69.522) R5.1@90.475,69.522 ; R5.1@90.236,69.716 ccw(c89.659,70.293) 90.475,70.293 ; R5.1@90.236,69.716 ccw(c89.659,70.293) 90.475,70.293 ; R5.1@90.236,69.716 ccw(c89.659,70.293) 90.475,70.293 ; v1@90.268,70.634 cw(c89.769,70.135) 90.475,70.135 ; v1@90.268,70.634 cw(c89.769,70.135) 90.475,70.135 ; v1@90.268,70.634 cw(c89.769,70.135) 90.475,70.135 ; 90.475,70.293 ccw(c91.291,70.293) R5.1@90.714,69.716 ; 90.475,70.293 ccw(c91.291,70.293) R5.1@90.714,69.716 ; 90.475,70.293 ccw(c91.291,70.293) R5.1@90.714,69.716 ; USB1.B5@102.851,74.246 cw(c102.851,73.961) 103.053,74.163 ; USB1.B5@102.851,74.246 cw(c102.851,73.961) 103.053,74.163 ; USB1.B5@102.851,74.246 cw(c102.851,73.961) 103.053,74.163 ; USB1.B5@103.074,74.469 ccw(c103.865,74.469) v1@103.306,73.91 ; USB1.B5@103.074,74.469 ccw(c103.865,74.469) v1@103.306,73.91 ; USB1.B5@103.074,74.469 ccw(c103.865,74.469) v1@103.306,73.91 ; 103.124,74.091 cw(c102.744,73.711) v1@103.282,73.711 ; 103.124,74.091 ccw(c103.505,74.472) v1@103.505,73.934 ; 103.124,74.091 ccw(c103.505,74.472) v1@103.505,73.934 ; 103.124,74.091 cw(c102.744,73.711) v1@103.282,73.711 ; 103.124,74.091 ccw(c103.505,74.472) v1@103.505,73.934 ; 103.124,74.091 cw(c102.744,73.711) v1@103.282,73.711
  Bottom Layer w0.254: v1(90.246,70.612) 94.633,70.612 98.926,74.905 102.311,74.905 v1(103.505,73.711) ; v1@90.404,70.454 cw(c90.785,70.074) 90.785,70.612 ; v1@90.404,70.454 cw(c90.785,70.074) 90.785,70.612 ; v1@90.404,70.454 cw(c90.785,70.074) 90.785,70.612 ; v1@90.404,70.77 ccw(c90.785,71.15) 90.785,70.612 ; v1@90.404,70.77 ccw(c90.785,71.15) 90.785,70.612 ; v1@90.404,70.77 ccw(c90.785,71.15) 90.785,70.612 ; 103.124,74.091 cw(c102.744,73.711) v1@103.282,73.711 ; 103.124,74.091 ccw(c103.505,74.472) v1@103.505,73.934 ; 103.124,74.091 ccw(c103.505,74.472) v1@103.505,73.934 ; 103.124,74.091 cw(c102.744,73.711) v1@103.282,73.711 ; 103.124,74.091 ccw(c103.505,74.472) v1@103.505,73.934 ; 103.124,74.091 cw(c102.744,73.711) v1@103.282,73.711
CHAR_G: LED2.3 U3.12 | length 21.3
  Top Layer w0.203: U3.12@75.096,79.471 76.073,79.471 76.632,78.912 76.632,66.319 78.435,64.516 ; 78.621,64.33 78.435,64.516 ; LED2.3@80.233,63.279 79.672,63.279 ; 78.435,64.516 79.672,63.279 ; 79.672,63.279 cw(c79.672,62.976) LED2.3@79.925,63.143 ; 79.672,63.279 ccw(c79.672,63.582) LED2.3@79.925,63.416 ; 79.672,63.279 ccw(c79.672,63.582) LED2.3@79.925,63.416 ; 79.672,63.279 cw(c79.672,62.976) LED2.3@79.925,63.143 ; 79.672,63.279 ccw(c79.672,63.582) LED2.3@79.925,63.416 ; 79.672,63.279 cw(c79.672,62.976) LED2.3@79.925,63.143
CHARG_EN: U1.8 U3.4 | length 62.8
  Top Layer w0.203: v1(71.933,73.549) 71.997,73.613 71.997,75.565 ; 71.997,74.613 71.997,75.565 ; U3.4@71.997,78.372 71.997,75.565 ; v1@71.757,73.725 ccw(c71.178,74.304) 71.997,74.304 cw(c71.178,74.304) v1@71.757,73.725 ; 71.997,73.994 ccw(c72.377,73.994) 72.108,73.725 cw(c72.377,73.994) 71.997,73.994
  Top Layer w0.254: U1.8@93.929,90.907 v1@93.929,92.329 ; 93.929,91.491 94.132,91.288 U1.8@94.132,91.237 ; v1@93.797,92.298 cw(c93.478,91.979) 93.929,91.979 ; v1@93.797,92.298 cw(c93.478,91.979) 93.929,91.979 ; v1@93.797,92.298 cw(c93.478,91.979) 93.929,91.979 ; 93.884,91.536 cw(c93.673,91.325) U1.8@93.961,91.245 ; 93.884,91.536 cw(c93.673,91.325) U1.8@93.961,91.245 ; 93.884,91.536 cw(c93.673,91.325) U1.8@93.961,91.245 ; 93.929,91.504 ccw(c94.439,91.504) U1.8@94.079,91.144 ; 93.929,91.504 ccw(c94.439,91.504) U1.8@94.079,91.144 ; 93.929,91.504 ccw(c94.439,91.504) U1.8@94.079,91.144 ; 93.929,91.856 cw(c94.554,91.856) v1@94.112,92.298 ; 93.929,91.856 cw(c94.554,91.856) v1@94.112,92.298 ; 93.929,91.856 cw(c94.554,91.856) v1@94.112,92.298 ; v1@93.929,92.118 ccw(c95.052,92.118) U1.8@94.258,91.324 ; v1@93.929,92.118 ccw(c95.052,92.118) U1.8@94.258,91.324 ; v1@93.929,92.118 ccw(c95.052,92.118) U1.8@94.258,91.324
  Bottom Layer w0.254: v1(71.933,73.549) 83.938,73.549 86.396,76.007 86.396,76.847 87.706,78.158 87.706,78.234 88.923,79.451 93.37,79.451 97.485,83.566 97.485,89.764 96.469,90.78 94.412,90.78 93.955,91.237 v1(93.955,92.456) ; 72.471,73.549 ccw(c72.471,73.011) 72.09,73.391 cw(c72.471,73.011) 72.471,73.549 ; 72.471,73.549 cw(c72.471,74.087) 72.09,73.707 ccw(c72.471,74.087) 72.471,73.549 ; v1@93.797,92.298 cw(c93.416,91.918) 93.955,91.918 ; v1@93.797,92.298 cw(c93.416,91.918) 93.955,91.918 ; v1@93.797,92.298 cw(c93.416,91.918) 93.955,91.918 ; 93.955,91.918 cw(c94.493,91.918) v1@94.112,92.298 ; 93.955,91.918 cw(c94.493,91.918) v1@94.112,92.298 ; 93.955,91.918 cw(c94.493,91.918) v1@94.112,92.298
CHRG_R: LED2.1 U3.13 | length 21.7
  Top Layer w0.203: U3.13@75.096,79.871 76.212,79.871 77.013,79.07 77.013,76.683 ; 77.038,76.657 77.038,66.497 79.256,64.279 LED2.1@80.233,64.279 ; 79.533,64.279 cw(c79.533,63.68) LED2.1@79.957,64.104 ; 79.533,64.279 ccw(c79.533,64.879) LED2.1@79.957,64.455 ; 79.533,64.279 ccw(c79.533,64.879) LED2.1@79.957,64.455 ; 79.533,64.279 cw(c79.533,63.68) LED2.1@79.957,64.104 ; 79.533,64.279 ccw(c79.533,64.879) LED2.1@79.957,64.455 ; 79.533,64.279 cw(c79.533,63.68) LED2.1@79.957,64.104
CHRG_STATE: U1.7 U3.5 | length 59.6
  Top Layer w0.203: U3.5@72.397,78.372 72.397,76.391 72.746,76.042 v1(72.746,72.635) ; 72.746,73.234 ccw(c73.345,73.234) 72.921,72.81 cw(c73.345,73.234) 72.746,73.234 ; 72.746,73.234 cw(c72.146,73.234) 72.57,72.81 ccw(c72.146,73.234) 72.746,73.234
  Top Layer w0.254: U1.7@95.402,90.653 95.402,92.126 v1@95.428,92.151 ; v1@95.194,92.222 cw(c94.691,91.719) 95.402,91.719 ; v1@95.194,92.222 cw(c94.691,91.719) 95.402,91.719 ; v1@95.194,92.222 cw(c94.691,91.719) 95.402,91.719 ; U1.7@95.277,91.324 ccw(c94.973,91.627) 95.402,91.627 ; U1.7@95.277,91.324 ccw(c94.973,91.627) 95.402,91.627 ; U1.7@95.277,91.324 ccw(c94.973,91.627) 95.402,91.627 ; 95.402,91.627 ccw(c95.832,91.627) U1.7@95.528,91.324 ; 95.402,91.627 ccw(c95.832,91.627) U1.7@95.528,91.324 ; 95.402,91.627 ccw(c95.832,91.627) U1.7@95.528,91.324 ; 95.402,91.964 cw(c95.767,91.964) v1@95.509,92.222 ; 95.402,91.964 cw(c95.767,91.964) v1@95.509,92.222 ; 95.402,91.964 cw(c95.767,91.964) v1@95.509,92.222
  Bottom Layer w0.203: v1(72.746,72.635) 83.811,72.635 86.878,75.702 ; 73.345,72.635 ccw(c73.345,72.035) 72.921,72.459 cw(c73.345,72.035) 73.345,72.635 ; 73.345,72.635 cw(c73.345,73.234) 72.921,72.81 ccw(c73.345,73.234) 73.345,72.635
  Bottom Layer w0.254: 86.878,75.702 86.904,75.728 86.904,76.745 88.138,77.979 88.138,78.055 89.102,79.019 93.657,79.019 97.993,83.356 97.993,90.373 97.079,91.288 95.631,91.288 95.352,91.567 v1(95.352,92.38) ; v1@95.194,92.222 cw(c94.813,91.841) 95.352,91.841 ; v1@95.194,92.222 cw(c94.813,91.841) 95.352,91.841 ; v1@95.194,92.222 cw(c94.813,91.841) 95.352,91.841 ; 95.352,91.841 cw(c95.89,91.841) v1@95.509,92.222 ; 95.352,91.841 cw(c95.89,91.841) v1@95.509,92.222 ; 95.352,91.841 cw(c95.89,91.841) v1@95.509,92.222